# Altium PCB Mother_Board_New - 4 Layers - Fixed.PcbDoc (part 1 of 2)
Units mil, origin at the board's own origin, x right, y up, seen from the top; angles counter-clockwise.
Board outline 4940 x 2025 mil, 3 copper layers (Layer 1, Layer 2, Layer 3), stack 76.411 mil thick; 104 components, 89 nets, 362 pads, 31 vias.
Unrouted connection lines stored in the file: 65.
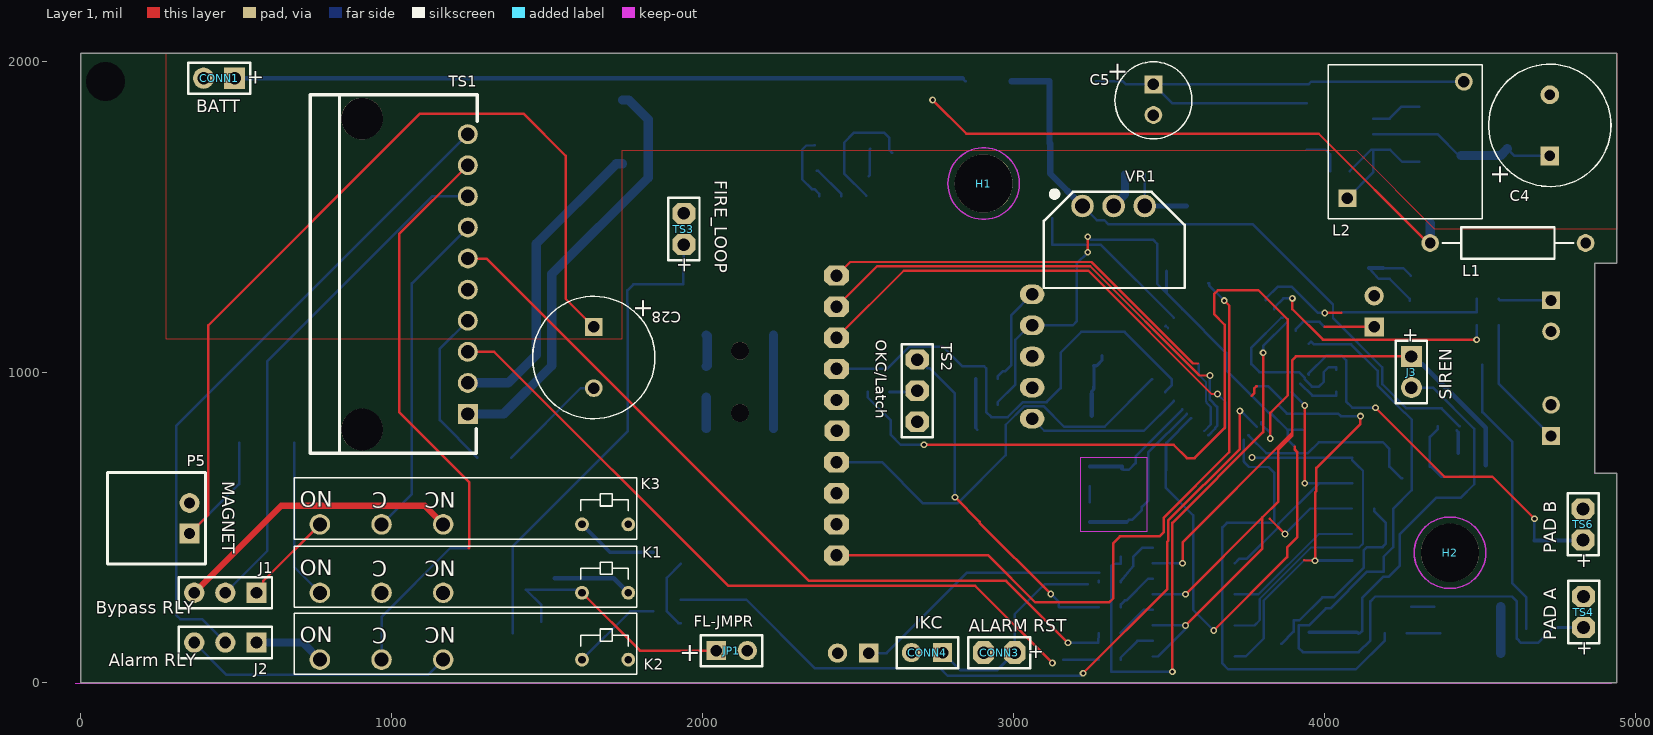
[diagram p0: Layer 1 view]
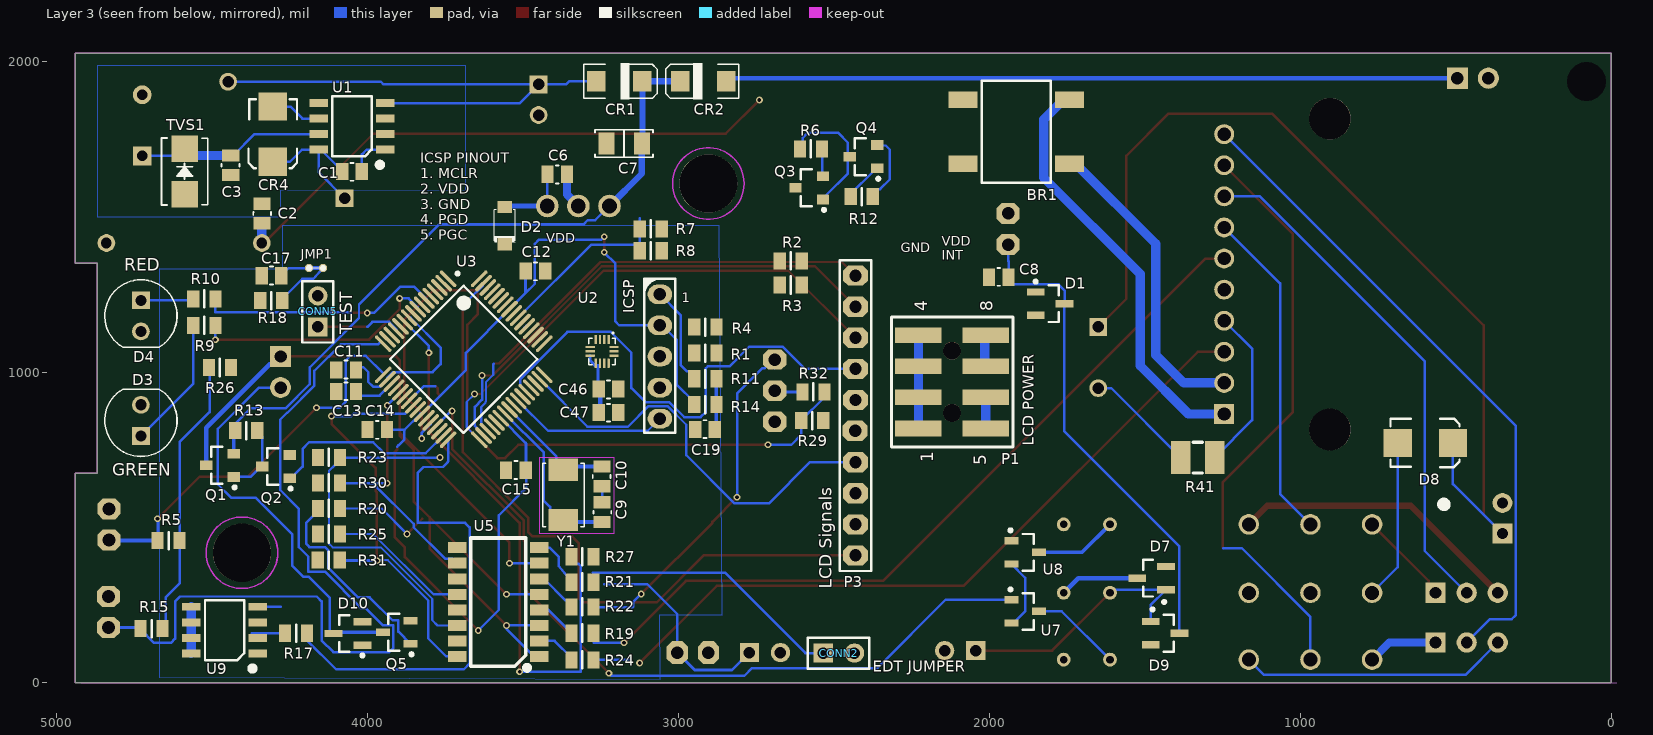
[diagram p1: Layer 3 view, seen from below]
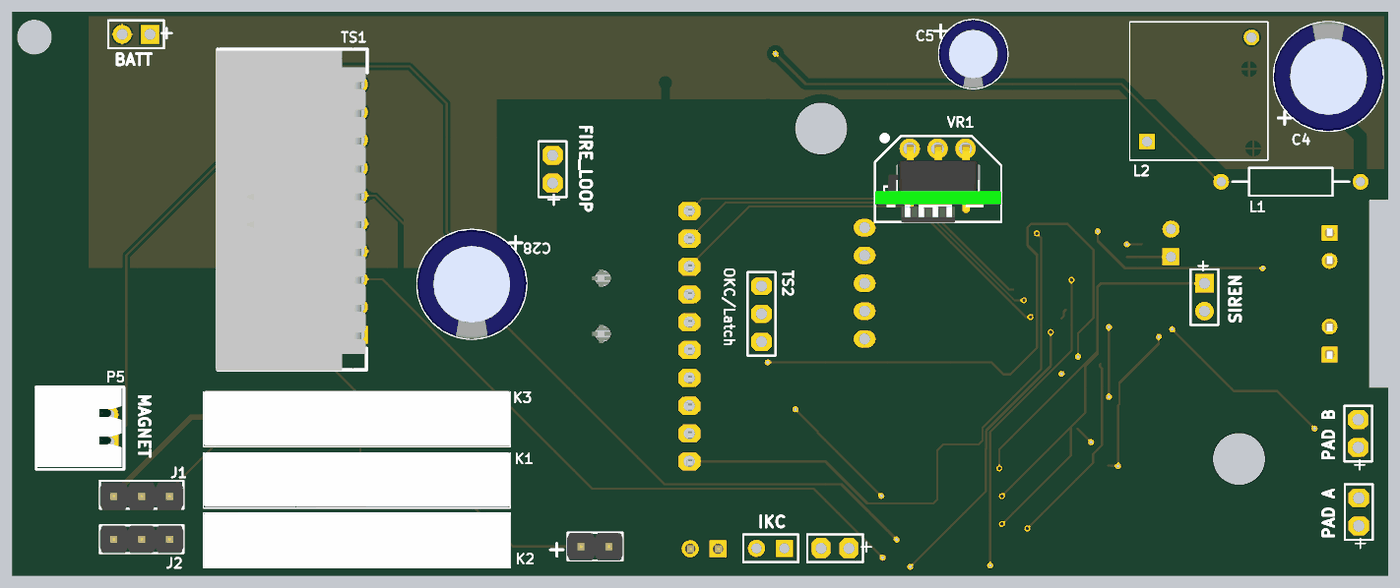
[diagram p3: 3D render of the assembled board from above, using the file's embedded part models]
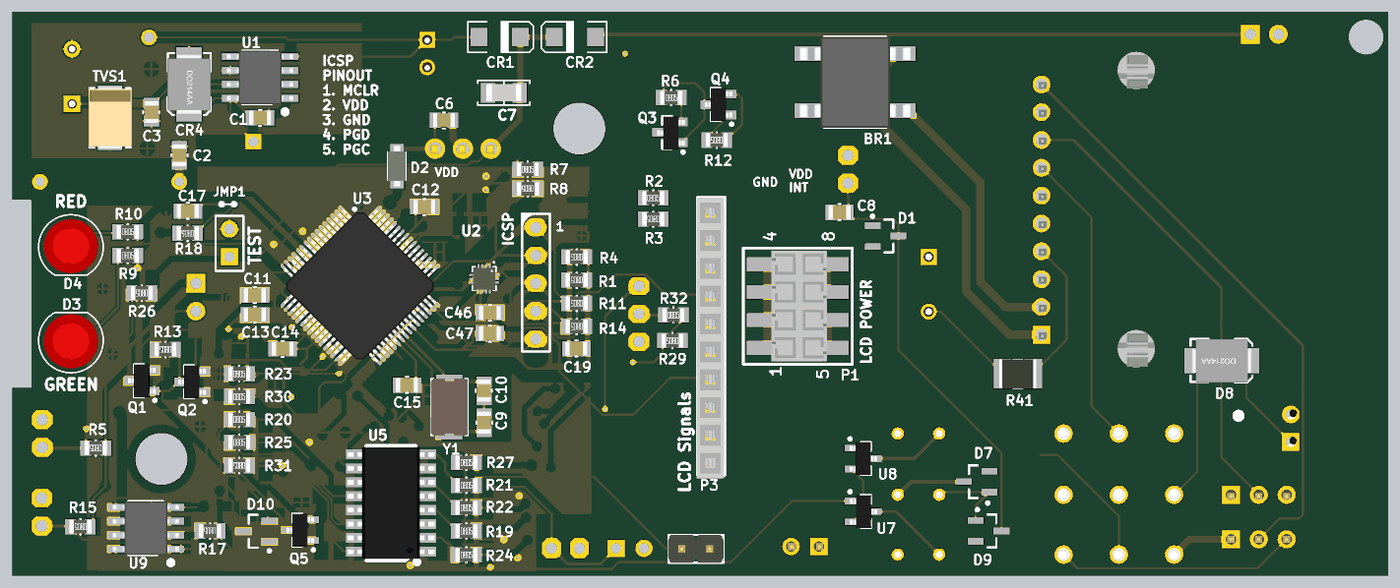
[diagram p4: 3D render of the assembled board from below, using the file's embedded part models]

## Layer stack, top to bottom
Dielectric 3: prepreg 2.8, PP-006, Dk 4.1
Layer 1: signal copper 3.937
Dielectric 2: prepreg 2.8, PP-006, Dk 4.1
Layer 2: signal copper 3.937
Dielectric 1: core 59, Core-043, Dk 4.3
Layer 3: signal copper 3.937

## Board outline
0,2025 0,0 4940,0 4940,675 4870,675 4870,1350 4940,1350 4940,2025

## Design rules (kind name [scope] priority, off if disabled: settings)
BoardOutlineClearance [All] p1: gap=15 ignorepadtopadclearanceinfootprint=FALSE
Clearance "Clearance Polygons" [InPolygon] p1: gap=10 ignorepadtopadclearanceinfootprint=FALSE except(0: Arc-Hole Track-Hole SMDPad-Hole THPad-Hole Via-Hole Fill-Hole Poly-Hole Region-Hole Text-Hole)
Clearance [All] p2: gap=5 ignorepadtopadclearanceinfootprint=FALSE except(0: Arc-Hole Track-Hole SMDPad-Hole THPad-Hole Via-Hole Fill-Hole Poly-Hole Region-Hole Text-Hole)
ComponentClearance "HM-TRP & UFL" [InComponent('X1') vs InComponent('U1')] p1 off: gap=0 collisioncheckmode=3 verticalgap=0 showdistances=FALSE
ComponentClearance [All] p2 off: gap=1 collisioncheckmode=3 verticalgap=1 showdistances=FALSE
DiffPairsRouting [All] p1: maxlimit=393.7 minlimit=5 mostfreqgap=8 toplayer_minwidth=5 toplayer_maxwidth=15 toplayer_prefwidth=8 midlayer1_minwidth=5 midlayer1_maxwidth=15 midlayer1_prefwidth=8 bottomlayer_minwidth=5 bottomlayer_maxwidth=15 bottomlayer_prefwidth=8 maxuncoupledlength=500
HoleSize [All] p1: absolutevalues=TRUE maxlimit=265 minlimit=10 maxpercent=80.000 minpercent=20.000
HoleToHoleClearance [All] p1: gap=10 allowstackedmicrovias=FALSE
MinimumAnnularRing [All] p1: minimumring=4
MinimumSolderMaskSliver [All] p1: minsoldermaskwidth=0
PlaneClearance [All] p1: clearance=10
PlaneConnect [All] p1: planeconnectstyle=Relief reliefexpansion=4 reliefentries=4 reliefconductorwidth=6 reliefairgap=6
PolygonConnect "Via connect style" [isVia] p1: thpad.connectstyle=Relief thpad.reliefconductorwidth=8 thpad.reliefentries=4 thpad.polygonreliefangle="90 Angle" thpad.airgapwidth=8 smdpad.connectstyle=Direct smdpad.reliefconductorwidth=10 smdpad.reliefentries=4 smdpad.polygonreliefangle="90 Angle" smdpad.airgapwidth=10 via.connectstyle=Direct via.reliefconductorwidth=10 via.reliefentries=4 via.polygonreliefangle="90 Angle" via.airgapwidth=10
PolygonConnect [All] p2: connectstyle=Relief reliefconductorwidth=10 reliefentries=4 polygonreliefangle="90 Angle" airgapwidth=6
RoutingCorners [All] p1: cornerstyle=45-Degree minsetback=49.21 maxsetback=49.21
RoutingVias [All] p1: holewidth=12 width=22 viastyle="Through Hole" minholewidth=10 minwidth=18 maxholewidth=100 maxwidth=114
SMDEntry [All] p1: side=TRUE corner=TRUE anyangle=FALSE
SMDNeckDown [All] p1: percent=50.000
SMDToCorner [All] p1: distance=20000
SMDToPlane [All] p1: distance=40000
SilkToSilkClearance [All] p1: silktosilkclearance=0
SilkToSolderMaskClearance [IsPad] p1: minsilkscreentomaskgap=5 clearancetoexposedcopper=TRUE
SolderMaskExpansion [All] p1: expansion=2.5 istentingtop=FALSE
Width GND [InNet('GND')] p1: maxlimit=30 minlimit=10 preferedwidth=20
Width Power [InNetClass('Power')] p2: maxlimit=40 minlimit=20 preferedwidth=30
Width 3V3 [InNetClass('3V3')] p3: maxlimit=30 minlimit=10 preferedwidth=20
Width [All] p4: maxlimit=400 minlimit=6 preferedwidth=8
20 further rules are at their usual default settings.

## Classes and differential pairs
component class U_Power: BR1 C1 C2 C3 C4 C5 C6 C7 CONN1 CR1 CR2 CR4 L1 L2 R2 R3 TVS1 U1 VR1
component class Relay_Outputs: J1 J2 K2 K3 U7 U8
component class U_MotherBoard: H1 H2
component class U_microcontroller: C8 C9 C10 C11 C12 C13 C15 C17 C19 C28 C46 C47 CONN2 CONN3 CONN4 CONN5 D1 D2 D3 D4 D7 D8 D9 D10 J3 JMP1 JP1 K1 P1 P3 P5 Q1 Q2 Q3 Q4 Q5 R1 R4 R5 R6 R7 R8 R9 R10 R11 R12 R13 R14 R15 R17 R18 R19 R20 R21 R22 R23 R24 R25 R26 R27 R29 R30 R31 R32 R41 TS1 TS2 TS3 TS4 TS6 U2 U3 U5 U9 Y1

## Components (designator, comment, footprint, x,y, rotation, side; value= is the part's Value field where it differs from the comment)
BR1 "DF02S" SOP520P1005X363-4N 1913.74,1772.64 r0 bottom
C1 "Cap" C0805 4050,1645 r180 bottom value=10pF
C2 "Cap" C0805 4340,1510 r90 bottom value=10nF
C3 "Cap" C0805 4440,1665 r270 bottom value=10nF
C4 "Cap Pol3" "10x12.5 CAP"#1 4725,1793.43 r90 top value=220uF
C5 "Cap Pol3" "6.3x15 Cap" 3450,1875.79 r270 top value=82uF
C6 "Cap Pol3" C0805 3389.93,1636.24 r180 bottom value=22uF
C7 "Cap 1206" "CAP 1206_3216 - 1.2MM" 3175,1735 r0 bottom value=10uF
C8 "Cap" C0805 1970,1305 r0 bottom value=0.1uF
C9 "Cap" C0805 3246,549.29 r90 bottom value=27pF
C10 "Cap" C0805 3246,664.29 r270 bottom value=27pF
C11 "Cap" C0805 4069,1007 r0 bottom value=10uF
C12 "Cap" C0805 3460,1325 r180 bottom value=100nF
C13 "Cap" C0805 4069,937 r0 bottom value=100nF
C14 "Cap" C0805 3969,815 r180 bottom value=100nF
C15 "Cap" C0805 3523,684 r0 bottom value=100nF
C17 "Cap" C0805 4309.29,1309.57 r0 bottom value=0.1uF
C19 "Cap" C0805 2915,815 r0 bottom value=0.1uF
C28 "Cap Pol3" "10x12.5 CAP"#2 1650,1046.57 r270 top value=220uF
C46 "Cap" C0805 3225,945 r180 bottom value=10uF
C47 "Cap" C0805 3225,870 r180 bottom value=0.1uF
CONN1 "BATT" BAT-2#1 445,1945 r180 top
CONN2 "EDT JUMPER" "2 PIN HEADER" 2434,96 r0 bottom
CONN3 "ALARM RST" BAT-2#2 2954,97.57 r180 top
CONN4 "IKC" "2 PIN HEADER" 2672,97.57 r0 top
CONN5 "TEST" "2 PIN HEADER" 4160,1245 r270 bottom
CR1 "Diode" "DIODE SMA" 3190,1935 r180 bottom
CR2 "Diode" "DIODE SMA" 2920,1935 r0 bottom
CR4 "D Schottky" SMB 4305,1765 r270 bottom locked
D1 "Diode" SOT-23_M 1805,1220 r180 bottom
D2 "D Schottky" SOD-123FL 3559,1471 r0 bottom
D3 "GREEN" "T-1 3/4" 4729.02,844.49 r90 bottom locked
D4 "RED" "T-1 3/4" 4729.02,1180.51 r270 bottom locked
D7 "Diode" SOT-23_M 1478,337 r0 bottom
D8 "Diode" SMB 598,772 r180 bottom
D9 "Diode" SOT-23_M 1435,160 r180 bottom
D10 "Diode" SOT-23_M 4063,159 r0 bottom
H1 "Siren Mounting Hole" "Siren Mount Hole"#1 1895,-155 r180 top locked
H2 "Siren Mounting Hole" "Siren Mount Hole"#2 1645,-155 r180 top locked
ICSP "" "SCHMARTBOARD - 920-0088-01" 2110,1629.92 r180 bottom
J1 "Bypass RLY" "3 PIN HEADER FOR RELAY" 465,290 r0 top
J2 "Alarm RLY" "3 PIN HEADER FOR RELAY" 465,130 r0 top
J3 "SIREN" BAT-2#3 4280,1000 r270 top
JMP1 "DogBone" DogBone 4158.24,1334.26 r0 bottom
JP1 "FL-JMPR" "2 PIN HEADER" 2144,104 r180 top
K1 "24V Relay" FTR-LY 1265,290 r180 top locked
K2 "24V Relay" FTR-LY 1265,75 r180 top locked
K3 "24V Relay" FTR-LY 1265,510 r180 top locked
L1 "Inductor" AXIAL-0.5 4590,1415 r0 top value=100uH
L2 "Inductor" PE-53819NL 4261.4,1746.4 r180 top locked value=173uH
P1 "LCD POWER" "MOLEX 15453508" 2120.3,968.36 r90 bottom locked
P3 "LCD Signals" "10 PIN HEADER" 2430.75,860 r180 bottom locked
P5 "MAGNET" 7025 350,529.57 r90 top locked
Q1 "FDN340P" SOT-23_N#1 4474.83,700 r0 bottom
Q2 "2N7002" SOT-23_N#1 4294.83,696 r0 bottom
Q3 "FDN340P" SOT-23_N#1 2579.14,1592.56 r0 bottom
Q4 "2N7002" SOT-23_N#1 2404.85,1692.56 r0 bottom
Q5 "2N3904" SOT-23_N#2 3906,163 r0 bottom value=MMBT2222
R1 "Res3" 6-0805_N 2913.59,1061.33 r0 bottom value=1K
R2 "1%" 6-0805_N 2638.83,1357.44 r180 bottom value=220K
R3 "1%" 6-0805_N 2638.83,1280.44 r0 bottom value=130K
R4 "Res3" 6-0805_N 2913.59,1144.49 r0 bottom value=10K
R5 "Res3" 6-0805_N 4640,458 r0 bottom value=10k
R6 "Resistor 10k +/-1% 0805" 6-0805_N 2574.14,1717.56 r180 bottom value=10k
R7 "1%" 6-0805_N 3089,1460 r180 bottom value=2M
R8 "1%" 6-0805_N 3089,1390 r0 bottom value=320K
R9 "Res3" 6-0805_N 4525,1150 r180 bottom value=178R
R10 "Res3" 6-0805_N 4525,1235 r180 bottom value=604R
R11 "Resistor 1k +/-1% 0603 100 mW" 6-0805_N 2913.59,978.16 r0 bottom value=470
R12 "Res3" 6-0805_N 2410.81,1564.78 r0 bottom value=10K
R13 "Resistor 10k +/-1% 0805" 6-0805_N 4390,812 r0 bottom value=10k
R14 "Resistor 10k +/-1% 0805" 6-0805_N 2913.59,895 r0 bottom value=10k
R15 "Res3" 6-0805_N 4695,175 r0 bottom value=10k
R17 "Res3" 6-0805_N 4230,160 r0 bottom value=3.3k
R18 "Res3" 6-0805_N 4310,1230 r0 bottom value=10k
R19 "Res3" 6-0805_N 3309,160 r180 bottom value=1.8K
R20 "Resistor 2.2k +/-5% 0805" 6-0805_N 4124.25,560.75 r180 bottom value=2.2k
R21 "Res3" 6-0805_N 3309,324 r180 bottom value=1.8K
R22 "Res3" 6-0805_N 3309,244 r180 bottom value=1.8K
R23 "Res3" 6-0805_N 4124.25,725 r180 bottom value=10K
R24 "Res3" 6-0805_N 3309,74 r180 bottom value=1.8K
R25 "Res3" 6-0805_N 4124.25,478.62 r180 bottom value=10K
R26 "Res3" 6-0805_N 4475,1015 r0 bottom value=10k
R27 "Res3" 6-0805_N 3309,406 r180 bottom value=10k
R29 "Res3" 6-0805_N 2570,844 r0 bottom value=10K
R30 "Res3" 6-0805_N 4124.25,642.87 r180 bottom value=10K
R31 "Res3" 6-0805_N 4125,395 r0 bottom value=10K
R32 "Res3" 6-0805_N 2566,936 r180 bottom value=1K
R41 "10R" RESC_1210 1330,720 r180 bottom
TS1 "Molex SL Header" "10 Pin Molex Horizontal - duplicate" 1245,1315 r90 top locked
TS2 "OKC/Latch" "3 Pin Footprint" 2690,940 r270 top
TS3 "FIRE_LOOP" BAT-2#2 1940,1460 r90 top
TS4 "PAD A" BAT-2#4 4834,228 r90 top
TS6 "PAD B" BAT-2#4 4832,510 r90 top
TVS1 "SMBJ43CA" SMBJSeries_LTF 4588.45,1645.18 r270 bottom
U1 "LM2674" SOIC127P600X175-8N 4050,1790 r0 bottom locked
U2 "LIS2DHTR" PQFN35P200X200X100-14N 3245.67,1066.61 r270 bottom
U3 "PIC18F67J10T-I/PT" PIC18F67J10T-I/PT 3691.06,1040.95 r225 bottom locked
U5 "TCMT4106" SSOP-16 3580,260 r0 bottom
U7 "SZNUD3160LT1G" SOT-23_N#2 1885,230 r180 bottom
U8 "SZNUD3160LT1G" SOT-23_N#2 1885,420 r180 bottom
U9 "AUIPS7091GTR" SOIC127P600X175-8N 4460,170 r0 bottom
VR1 "" VXO78-1000 3322,1534 r0 top locked
Y1 "8MHz" ABM3 3371,605 r90 bottom

## Footprints (in the part's own frame and the unit in brackets; to place one, negate y for a bottom-side part, rotate by r counter-clockwise, add the part's x,y. Pads: shape width x height; smd on the part's side, far side on the other; paste and mask are expansions set on the pad)
"2 PIN HEADER" [mil]
  rect 62x62 hole 37: 1(100,0)
  round 62 hole 37: 2(0,0)
  silkscreen extent -47,-50 150,50, body extent -48,-49 152,51, height 341
"3 Pin Footprint" [mil]
  oct 65x75 hole 40: 1(100,0) 2(0,0) 3(-100,0)
  silkscreen extent -150,-50 150,50
"3 PIN HEADER FOR RELAY" [mil]
  rect 65x65 hole 38: 1(100,0)
  round 65 hole 38: 2(0,0) 3(-100,0)
  silkscreen extent -150,-50 150,50, body extent -150,-56 150,44, height 343
6-0805_N [mm] "Chip Resistor, Body 2.0x1.2mm, IPC Medium Density"
  rect 1x1.4 smd: 1(-0.9,0) 2(0.9,0)
  silkscreen extent 0,-0.69 0,0.71, body extent -1.01,-0.63 0.99,0.62, height 0.2
"6.3x15 Cap" [mil] "6.3x15 Cap"
  rect 57x57 hole 37: 1(-49.21,0)
  round 57 hole 37: 2(49.21,0)
  silkscreen extent -122,-124 126,124, body extent -122,-124 126,124, height 520
"10 PIN HEADER" [mil] "10 pin header, vertical"
  oct 80x65 hole 40: 1(0,-450) 2(0,-350) 3(0,-250) 4(0,-150) 5(-1,-49) 6(0,50) 7(0,150) 8(0,250) 9(0,350) 10(0,450)
  silkscreen extent -50,-500 50,500, body extent -52,-511 46,498, height 346
"10 Pin Molex Horizontal - duplicate" [mil] "Horizontal Molex SL 10 Pin Connector"
  round 133.86 hole 133.86 unplated mask+0: 0(-500,340.16) 0(500,340.16)
  rect 64x64 hole 42.91: 1(-450,0)
  round 64 hole 42.91: 2(-350,0) 3(-250,0) 4(-150,0) 5(-50,0) 6(50,0) 7(150,0) 8(250,0) 9(350,0) 10(450,0)
  silkscreen extent -576,-30 578,507, body extent -579,-24 571,511, height 278
"10x12.5 CAP"#1 [mil] "10x12.5 CAP"
  rect 60x60 hole 34: 1(-98.43,0)
  round 60 hole 34: 2(98.42,0)
  silkscreen extent -197,-197 197,197, body extent -197,-197 197,197, height 500
"10x12.5 CAP"#2 [mil] "10x12.5 CAP"
  rect 57x57 hole 37: 1(-98.43,0)
  round 57 hole 37: 2(98.42,0)
  silkscreen extent -197,-197 197,197, body extent -197,-197 197,197, height 500
7025 [mil] "MOLEX SPOX 2-terminal right angle through hole header"
  rect 64x64 hole 35.43: 1(-49.21,0)
  round 64 hole 35.43: 2(49.21,0)
  silkscreen extent -148,-51 148,264, body extent -140,-42 151,269, height 195
ABM3 [mm] "8MHz Crystal SMD"
  rect 1.8x2.4 smd: 1(-2.05,0) 2(2.05,0)
  silkscreen extent -2.59,-1.73 2.59,1.68, body extent -2.6,-1.7 2.6,1.7, height 1.3
AXIAL-0.5 [mil] "Axial Device, Thru-Hole; 2 Leads; 0.5 in Pin Spacing"
  round 57 hole 34: 1(-250,0) 2(250,0)
  silkscreen extent -210,-50 210,50
BAT-2#1 [mil] "Battery; 2 Leads"
  rect 68x68 hole 40: 1(-50,0)
  round 68 hole 40: 2(50,0)
  silkscreen extent -100,-50 100,50
BAT-2#2 [mil] "Battery; 2 Leads"
  oct 68x74 hole 40: 1(-50,0) 2(50,0)
  silkscreen extent -100,-50 100,50
BAT-2#3 [mil] "Battery; 2 Leads"
  rect 67x67 hole 40: 1(-50,0)
  round 67 hole 40: 2(50,0)
  silkscreen extent -100,-50 100,50
BAT-2#4 [mil] "Battery; 2 Leads"
  oct 68x74 hole 42: 1(-50,0) 2(50,0)
  silkscreen extent -100,-50 100,50
C0805 [mm]
  rect 1x1.4 smd: 1(-0.8,0) 2(0.8,0)
  silkscreen extent -0.12,-0.75 0.12,0.7, body extent -1,-0.64 1,0.64, height 1.27
"CAP 1206_3216 - 1.2MM" [mm] "Chip Capacitor, 2-Leads, Body 3.25x1.60mm, IPC Medium Density"
  rect 1.3x1.8 smd: 1(-1.45,0) 2(1.45,0)
  silkscreen extent -2.38,-1.13 2.38,1.13, body extent -1.6,-0.8 1.6,0.8, height 1.2
"DIODE SMA" [mm] "DIODE SMA Package"
  rect 1.52x1.68 smd: 1(-1.88,0) 2(1.88,0)
  silkscreen extent -2.9,-1.46 3.07,1.46, body extent -2.28,-1.45 2.32,1.45, height 2.4
DogBone [mil]
  oct 25x25 smd mask+4: 1(-15,0) 2(30,0)
FTR-LY [mil] "SPDT RELAY 6A SLIM TYPE"
  round 66 hole 45: 1(297.64,0) 2(99.21,0) 3(496.06,0)
  round 44.37 hole 24.68: 4(-496.06,0) 5(-347.24,0)
  silkscreen extent -524,-150 579,47, body extent -525,-153 577,43, height 571
"MOLEX 15453508" [mil] "2.54mm Pitch C-Grid PCB Connector, Surface Mount, High Profile, Dual Row, Vertical, 8 Circuits"
  round 57 hole 57 unplated: 0(-100,0) 0(100,0)
  rect 50x150 smd: 1(-150,108) 2(-50,108) 3(50,108) 4(150,108) 5(-150,-108) 6(-50,-108) 7(50,-108) 8(150,-108)
  silkscreen extent -209,-196 208,195, body extent -200,-139 199,127, height 40
PE-53819NL [mil] "INDUCTOR for 12V Regulator"
  rect 57x57 hole 37: 1(187.4,187.4)
  round 57 hole 37: 2(-187.4,-187.4)
  silkscreen extent -246,-243 250,254, body extent -246,-242 250,254, height 375
PIC18F67J10T-I/PT [mm]
  oval 1.8x0.3 smd: 1(-5.55,3.75) 2(-5.55,3.25) 3(-5.55,2.75) 4(-5.55,2.25) 5(-5.55,1.75) 6(-5.55,1.25) 7(-5.55,0.75) 8(-5.55,0.25) 9(-5.55,-0.25) 10(-5.55,-0.75) 11(-5.55,-1.25) 12(-5.55,-1.75) 13(-5.55,-2.25) 14(-5.55,-2.75) 15(-5.55,-3.25) 16(-5.55,-3.75) 33(5.55,-3.75) 34(5.55,-3.25) 35(5.55,-2.75) 36(5.55,-2.25) 37(5.55,-1.75) 38(5.55,-1.25) 39(5.55,-0.75) 40(5.55,-0.25) 41(5.55,0.25) 42(5.55,0.75) 43(5.55,1.25) 44(5.55,1.75) 45(5.55,2.25) 46(5.55,2.75) 47(5.55,3.25) 48(5.55,3.75)
  oval 0.3x1.8 smd: 17(-3.75,-5.55) 18(-3.25,-5.55) 19(-2.75,-5.55) 20(-2.25,-5.55) 21(-1.75,-5.55) 22(-1.25,-5.55) 23(-0.75,-5.55) 24(-0.25,-5.55) 25(0.25,-5.55) 26(0.75,-5.55) 27(1.25,-5.55) 28(1.75,-5.55) 29(2.25,-5.55) 30(2.75,-5.55) 31(3.25,-5.55) 32(3.75,-5.55) 49(3.75,5.55) 50(3.25,5.55) 51(2.75,5.55) 52(2.25,5.55) 53(1.75,5.55) 54(1.25,5.55) 55(0.75,5.55) 56(0.25,5.55) 57(-0.25,5.55) 58(-0.75,5.55) 59(-1.25,5.55) 60(-1.75,5.55) 61(-2.25,5.55) 62(-2.75,5.55) 63(-3.25,5.55) 64(-3.75,5.55)
  silkscreen extent -5.42,-4.25 4.25,4.72, body extent -6,-6 6,6, height 1.2
PQFN35P200X200X100-14N [mm]
  rrect25% 0.75x0.2 smd: 1(-0.975,0.525) 2(-0.975,0.175) 3(-0.975,-0.175) 4(-0.975,-0.525) 8(0.975,-0.525) 9(0.975,-0.175) 10(0.975,0.175) 11(0.975,0.525)
  rrect25% 0.2x0.75 smd: 5(-0.35,-0.975) 6(0,-0.975) 7(0.35,-0.975) 12(0.35,0.975) 13(0,0.975) 14(-0.35,0.975)
  silkscreen extent -1.55,-1.08 1.08,1.08, body extent -1,-1 1,1, height 1
RESC_1210 [mm]
  rect 1.6x2.7 smd: 1(-1.4,0.127) 2(1.4,0.127)
  silkscreen extent -0.4,-1.12 0.4,1.38, body extent -1.68,-1.19 1.67,1.45, height 0.71
"SCHMARTBOARD - 920-0088-01" [mm] "Arduino pin header set"
  oval 2x1.6 hole 1.02: 1(-24.13,-9.65) 2(-24.13,-12.19) 3(-24.13,-14.73) 4(-24.13,-17.27) 5(-24.13,-19.81)
  silkscreen extent -25.4,-20.95 -22.86,-8.38
"Siren Mount Hole"#1 [mil]
  round 187 hole 187 unplated: 0(-1009,-1761.3)
"Siren Mount Hole"#2 [mil]
  round 187 hole 187 unplated: 0(-2759,-573.7)
SMB [mm] "DO-214-AA/SMB; 2 C-Bend Leads; Body 5.3 x 3.6 mm, inc. leads (LxW)"
  rect 2.3x2.3 smd: 1(-2.25,0) 2(2.25,0)
  silkscreen extent -2.84,-1.98 2.79,1.98, body extent -2.79,-1.97 2.79,1.97, height 2.28
SMBJSeries_LTF [mil]
  rect 86x86 smd paste+0 mask+0: 1(-73,0) 2(73,0)
  silkscreen extent -107,-75 108,74, body extent -110,-77 110,77, height 98
SOD-123FL [mm]
  rect 1.2x1 smd mask+0: 1(0,1.525) 2(0,-1.525)
  silkscreen extent -0.85,-1.3 0.85,1.35, body extent -0.8,-1.85 0.8,1.85, height 1.15
SOIC127P600X175-8N [mm]
  rect 1.525x0.65 smd: 1(-2.712,1.905) 2(-2.712,0.635) 3(-2.712,-0.635) 4(-2.712,-1.905) 5(2.712,-1.905) 6(2.712,-0.635) 7(2.712,0.635) 8(2.712,1.905)
  silkscreen extent -2.48,-2.45 1.6,3.35, body extent -3,-2.45 3,2.45, height 1.75
SOP520P1005X363-4N [mm]
  rect 2.35x1.35 smd: 1(-4.35,2.6) 2(-4.35,-2.6) 3(4.35,-2.6) 4(4.35,2.6)
  silkscreen extent -2.82,-4.16 2.82,4.16, body extent -5.03,-4.16 5.02,4.16, height 3.63
SOT-23_M [mm] "SOT23, 3-Leads, Body 2.9x1.3mm, Pitch 0.95mm, Lead Span 2.5mm, IPC Low Density"
  rect 1.45x0.6 smd: 1(-1.175,0.95) 2(-1.175,-0.95) 3(1.175,0)
  silkscreen extent -1.3,-1.5 0.7,1.92, body extent -0.7,-1.5 0.7,1.5, height 1.1
SOT-23_N#1 [mm] "SOT23, 3-Leads, Body 2.9x1.3mm, Pitch 0.95mm, Lead Span 2.5mm, IPC Medium Density"
  rect 1x0.8 smd: 1(-1.125,0.95) 2(-1.125,-0.95) 3(1.125,0)
  silkscreen extent -1.32,-1.5 0.7,1.92, body extent -1.25,-1.5 1.25,1.5, height 1.1
SOT-23_N#2 [mm] "SOT23, 3-Leads, Body 2.9x1.3mm, Pitch 0.95mm, Lead Span 2.5mm, IPC Medium Density"
  rect 1.15x0.6 smd: 1(-1.125,0.95) 2(-1.125,-0.95) 3(1.125,0)
  silkscreen extent -1.32,-1.5 0.7,1.92, body extent -1.25,-1.5 1.25,1.5, height 1.1
SSOP-16 [mm]
  rect 1.5x0.9 smd mask+0: 1(-3.35,4.445) 2(-3.35,3.175) 3(-3.35,1.905) 4(-3.35,0.635) 5(-3.35,-0.635) 6(-3.35,-1.905) 7(-3.35,-3.175) 8(-3.35,-4.445) 9(3.35,-4.445) 10(3.35,-3.175) 11(3.35,-1.905) 12(3.35,-0.635) 13(3.35,0.635) 14(3.35,1.905) 15(3.35,3.175) 16(3.35,4.445)
  silkscreen extent -2.51,-5.24 2.25,5.52, body extent -3.96,-5.1 3.96,5.1, height 2.05
"T-1 3/4" [mil] "T-1 3/4 LED"
  rect 57x57 hole 36: 1(-50,0)
  round 57 hole 36: 2(50,0)
  silkscreen extent -116,-116 101,116, body extent -101,-98 96,98, height 315
VXO78-1000 [mm] "NON-ISOLATED DC SWITCHING REGULATOR"
  round 1.85 hole 1.2 mask+0: 1(-2.54,0) 2(0,0) 3(2.54,0)
  silkscreen extent -5.7,-6.7 5.8,1.2, body extent -5.69,-6.77 5.81,0.31, height 17.5

## Part data
BR1: "Bridge Rectifier", MFR=Vishay, ComponentLink1Description=Datasheet, ComponentLink1URL=http://www.vishay.com/docs/88573/dfs.pdf, Height=3.63mm, MFR P/N=DF02S, Mounting Technology=SMT
C1 C12 C13 C14 C15: "Capacitor", Case/Package=0805, Mounting Technology=SMT, PACKAGE=0805, PackageReference=0805
  C12 C13 C14 C15: ComponentLink1Description=Datasheet, Detex P/N=101727-1
C2 C3: library part CMP-001-00016-4, "Capacitor Ceramic X7R 50V 10nF 0805", Case/Package=1206, Tolerance=10%, Voltage Rating=50V, Detex P/N=101727-12, Mounting Technology=SMT, PACKAGE=1206, Pins=2
C4: "Polarized Capacitor (Surface Mount)", PACKAGE="10x12.5 50V radial capacitor", Voltage=50V, ComponentLink1Description=Datasheet, ComponentLink1URL=http://products.nichicon.co.jp/en/pdf/XJA043/e-uvz.pdf, Detex P/N=103517-221, Mounting Technology=Thru-Hole
C5: "Polarized Capacitor (Surface Mount)", MFR=Panasonic, MFR P/N=EEUFC1V820, PACKAGE="6.3x15 35V radial capacitor", Voltage=35V, ComponentLink1Description=Datasheet, ComponentLink1URL=http://www.farnell.com/datasheets/1901197.pdf, Detex P/N=102102-2, Mounting Technology=Thru-Hole
C6: "Multilayer Ceramic Capacitors MLCC - SMD/SMT 22UF 10V 20% 0805", Case/Package=0805, MFR="Murata Electronics", MFR P/N=GRM21BR61A226ME51L, Voltage=10V, ComponentLink1Description=Datasheet, ComponentLink1URL=http://www.farnell.com/datasheets/1901197.pdf, Mounting Technology=SMT, PACKAGE=0805, PackageReference=0805
C7: library part "Cap Pol3", "Multilayer Ceramic Capacitors MLCC - SMD/SMT 1206 50V 10uF 10% AEC-Q200", Case/Package=1206, MFR=TDK, MFR P/N=CGA5L1X7R1H106K160AC, Voltage=50V, ComponentLink1Description=Datasheet, ComponentLink1URL=https://product.tdk.com/info/en/catalog/datasheets/mlcc_automotive_general_en.pdf?ref_disty=mouser, Mounting Technology=SMT, PACKAGE=1206, PackageReference=1206
C8 C17 C19 C47: "Capacitor Ceramic X7R 50V 0.1uF 0805 SMT", Case/Package=0805, MFR=KEMET, MFR P/N=C0805C104K4RACTU, ComponentLink1Description=Datasheet, Detex P/N=101727‐7, Mounting Technology=SMT, PACKAGE=0805, PackageReference=0805
C9: library part CMP-001-00055-2, "Multilayer Ceramic Capacitors MLCC - SMD/SMT 100V 27pF C0G 0805 5% AEC-Q200", Case/Package=0805, MFR=AVX, MFR P/N=08051A270J4T2A, Tolerance=20%, Voltage Rating=25V, Mounting Technology=SMT, PACKAGE=0805, PackageReference=0805, Pins=2
C10: library part CMP-001-00055-2, "Multilayer Ceramic Capacitors MLCC - SMD/SMT 100V 27pF C0G 0805 5% AEC-Q200", Case/Package=0805, MFR=AVX, MFR P/N=08051A270J4T2A, PACKAGE="0805 SMD 1/8W", Tolerance=20%, Voltage Rating=25V, Mounting Technology=SMT, Pins=2
C11 C46: "Multilayer Ceramic Capacitors MLCC - SMD/SMT CGA 0805 6.3V 10uF X7R 10% AEC-Q200", Case/Package=0805, MFR=TDK, MFR P/N=CGA4J1X7R0J106K125AC, Voltage="6.3 V", ComponentLink1Description=Datasheet, ComponentLink1URL=https://product.tdk.com/info/en/catalog/datasheets/mlcc_automotive_general_en.pdf?ref_disty=mouser, Mounting Technology=SMT, PACKAGE=0805, PackageReference=0805
C28: "Polarized Capacitor (Surface Mount)", Case/Package=Radial, MFR=Nichicon, MFR P/N=URZ2A221MHD, PACKAGE="10x12.5mm Electrolytic Capacitor", ComponentLink1Description=Datasheet, PackageReference=Radial
CONN1 CONN3 J3: library part "Header 2", "Header, 2-Pin"
  CONN1: ComponentLink1Description=Datasheet
  CONN3: Mounting Technology=Thru-Hole
  J3: ComponentLink1Description=Datasheet, Mounting Technology=Thru-Hole
CONN2 CONN4 CONN5 JP1: library part "Header 2", "2.54mm Pitch 2 Way 1 Row Straight Pin Header, Through Hole", MFR="TE Connectivity", MFR P/N=5-146285-2
  CONN2 CONN4 CONN5: Mounting Technology=Thru-Hole
CR1 CR2: "Default Diode", Case/Package=DO-214AB, MFR P/N=4004TR, ComponentLink1Description=Datasheet, Detex P/N=PP-5970-2, Mounting Technology=SMT, PACKAGE=DO-214AB
CR4: "Schottky Barrier Rectifier", Case/Package=SMB, MFR=VIshay, MFR P/N=SS26, ComponentLink1Description=Datasheet, ComponentLink1URL=http://www.vishay.com/docs/88748/ss22.pdf, Detex P/N=101672-2, Mounting Technology=SMT, PACKAGE=SMB
D1 D7 D9 D10: "DIODE SIGNAL SMT 75 VOLTS", Case/Package=SOT-23, MFR P/N=1N4148W, PACKAGE=SOT-23-3, ComponentLink1Description=Datasheet, Detex P/N=PP-5932-1, Mounting Technology=SMT
D2: "Schottky Barrier Rectifier", Case/Package=SOD-123, MFR="ROHM Semiconductor", MFR P/N=RB161MM-20TR, PACKAGE=SOD-123FL, ComponentLink1Description=Datasheet, ComponentLink1URL=https://www.mouser.com/datasheet/2/348/rb161mm-20tr-e-1870160.pdf, Mounting Technology=SMT
D3: library part LED2, "Typical RED, GREEN, YELLOW, AMBER GaAs LED", Case/Package="T-1 3/4", Forward Voltage=2.65V, MFR=Kingbright, MFR P/N=WP7113LZGCK, ComponentLink1Description=Datasheet, Detex P/N=102671-2, PACKAGE="T-1 3/4"
D4: library part LED2, "Typical RED, GREEN, YELLOW, AMBER GaAs LED", Case/Package="T-1 3/4", Forward Voltage=1.8V, MFR=Kingbright, MFR P/N=WP7113LSECK/J3, ComponentLink1Description=Datasheet, Detex P/N=102671-1, PACKAGE="T-1 3/4"
D8: "DIODE RECTIFIER 4004 SMT", Case/Package=SMB, MFR P/N=4004TR, ComponentLink1Description=Datasheet, Detex P/N=PP‐5970‐2, Mounting Technology=SMT, PACKAGE=SMB
J1 J2: library part "Header 3", "Header, 3-Pin", ComponentLink1Description=Datasheet
K1 K2 K3: library part Relay-SPDT, "SPST (1 Form A)", MFR=Fujitsu, MFR P/N=FTR-LYAA024Y, ComponentLink1Description=Datasheet, Detex P/N=106224, Mounting Technology=Thru-Hole
  K1 K2: ComponentLink1URL=http://www.rmorais.utad.pt/RMPDFFiles/PDFDatasheets/FTR-LY.pdf
L1: MFR=Fastron, MFR P/N=SMCC/N-101J-01, PACKAGE="Leaded Inductor", ComponentLink1Description=Datasheet, ComponentLink1URL=http://www.fastrongroup.com/image-show/72/SMCC.pdf?type=Complete-DataSheet&productType=series, Detex P/N=101673-2, Mounting Technology=Thru-Hole
L2: MFR=Pulse, MFR P/N=PE-53819, PACKAGE="Toroid Inductor THT", ComponentLink1Description=Datasheet, ComponentLink1URL=http://products.pulseelex.com/files/product_files/SPM2007_47.pdf, Detex P/N=102104-1, Mounting Technology=Thru-Hole
P1: library part "2x4 Header", MFR=Samtec, MFR P/N=SSM-104-F-DV, ComponentLink1Description=Datasheet, ComponentLink1URL=https://www.mouser.com/datasheet/2/527/ssm_sm-1317000.pdf, Mounting Technology=SMT
P3: library part "Header 10", "Headers & Wire Housings 10 PIN SIL VERTICAL SOCKET", MFR=Harwin, MFR P/N=M20-7821042, Mounting Technology=Thru-Hole
P5 TS6: library part "Header 2", "Header, 2-Pin", MFR=Molex, MFR P/N=22-05-7025, ComponentLink1Description=Datasheet, Detex P/N=103520-2, Mounting Technology=Thru-Hole
Q1 Q3: library part MOSFET-P, "P-Channel MOSFET", Case/Package=SOT-23-3, MFR="ON Semiconductor / Fairchild", MFR P/N=NDS0605, PACKAGE=SOT-23, ComponentLink1Description=Datasheet, ComponentLink1URL=https://www.mouser.com/datasheet/2/308/NDS0605-1125221.pdf, Mounting Technology=SMT
Q2 Q4: library part MOSFET-N, "N-Channel MOSFET", Case/Package=SOT-23-3, MFR="ON Semiconductor", PACKAGE=SOT-23, ComponentLink1Description=Datasheet, ComponentLink1URL=https://www.mouser.com/datasheet/2/308/NDS7002A-D-1522662.pdf, Detex P/N=101676, MFR P/N=2N7002, Mounting Technology=SMT
Q5: library part 2N3904_SMT, "NPN Darlington Bipolar Transistor", Case/Package=SOT-23-3, MFR P/N=MMBT3904, PACKAGE=SOT-23, Design Item ID=2N3904_SMT, Detex P/N=PP-5933-1, Mounting Technology=SMT, Pin Count=3
R1 R32: "Resistor 1K Ohm 1% 0805 SMT", Case/Package=0805, MFR=Vishay/Dale, MFR P/N=CRCW08051K00FKEA, PACKAGE="0805 SMD 1/8W", ComponentLink1Description=Datasheet, Detex P/N=101734-12, Mounting Technology=SMT, PackageReference=0805
R2: library part Res3, "Resistor 220K Ohm 1% 0805 SMT", Case/Package=0805, PACKAGE="0805 SMD 1/8W", ComponentLink1Description=Datasheet, Detex P/N=101734-23, Mounting Technology=SMT
R3: library part Res3, "Resistor 130K Ohm 1% 0805 SMT", Case/Package=0805, MFR=Vishay/Dale, MFR P/N=CRCW0805130KFKEA, PACKAGE="0805 SMD 1/8W", ComponentLink1Description=Datasheet, Detex P/N=101734-X, Mounting Technology=SMT
R4 R5 R12 R15 R18 R23 R25 R26 R27 R29 R30 R31: "Resistor", Case/Package=0805, PACKAGE="0805 SMD 1/8W", ComponentLink1Description=Datasheet, Mounting Technology=SMT
  R23 R25 R29 R30 R31: PackageReference=0805
R6 R13 R14: library part CMP-009-00017-4, "Chip Resistor, 10 KOhm, +/- 1%, 01 W, -55 to 155 degC, 0805", Case/Package=0805, PACKAGE="0805 SMD 1/8W", Power=100mW, Tolerance=1%, Voltage Rating=50V, Mounting Technology=SMT, Pins=2
R7: library part Res3, "Resistor 2M Ohm 1% 0805 SMT", Case/Package=0805, MFR=Vishay/Dale, MFR P/N=CRCW08052M00FKEA, PACKAGE="0805 SMD 1/8W", ComponentLink1Description=Datasheet, Detex P/N=101734-25, Mounting Technology=SMT
R8: library part Res3, "Thin Film Resistors - SMD 1/8W 316K ohm 1% 50ppm", Case/Package=0805, MFR=Yageo, MFR P/N=RT0805FRE07316KL, PACKAGE="0805 SMD 1/8W", ComponentLink1Description=Datasheet, ComponentLink1URL=https://www.mouser.com/datasheet/2/447/PYu-RT_1-to-0.01_RoHS_L_11-1669912.pdf, Mounting Technology=SMT
R9: "Resistor", Case/Package=0805, MFR="Vishay / Dale", MFR P/N=CRCW0805178RFKEA, PACKAGE="0805 SMD 1/8W", ComponentLink1Description=Datasheet, Mounting Technology=SMT
R10: "Thick Film Resistors - SMD 1/8Watt 604ohms 1%", Case/Package=0805, MFR="Vishay / Dale", MFR P/N=CRCW0805604RFKEAC, PACKAGE="0805 SMD 1/8W", ComponentLink1Description=Datasheet, Mounting Technology=SMT
R11: library part CMP-009-00014-4, "Chip Resistor, 1 KOhm, +/-1%, 0.1 W, -55 to 155 degC, 0603 (1608 Metric)", Case/Package=0805, MFR=Vishay/Dale, MFR P/N=CRCW0805470RFKEA, Power=100mW, Tolerance=1%, Voltage Rating=50V, Detex P/N=101734-10, Mounting Technology=SMT, PACKAGE=0805, Pins=2
R17: "Resistor 3.3KOhm 5% 0805 SMT", Case/Package=0805, MFR=Vishay/Dale, MFR P/N=CRCW08053K30JNEA, PACKAGE="0805 SMD 1/8W", ComponentLink1Description=Datasheet, Detex P/N=101734-4, Mounting Technology=SMT, PackageReference=0805
R19 R21 R22 R24: "Resistor", Case/Package=0805, MFR="Vishay / Dale", MFR P/N=CRCW08051K82FKEA, PACKAGE="0805 SMD 1/8W", ComponentLink1Description=Datasheet, Mounting Technology=SMT
  R19 R21 R22: Detex P/N=101734-4
  R24: Detex P/N=101734-13
R20: library part CMP-009-00017-4, "Chip Resistor, 2.2KOhm, +/- 5%, 01 W, -55 to 155 degC, 0805", Case/Package=0805, PACKAGE="0805 SMD 1/8W", Power=100mW, Tolerance=1%, Voltage Rating=50V, Mounting Technology=SMT, Pins=2
R41: library part RESC_1210, "Resistor 10 Ohm 5% 1210 SMD", Case/Package=1210, MFR=Vishay/Dale, MFR P/N=CRCW121010R0JNEA, Detex P/N=101734-28, Mounting Technology=SMT, PACKAGE=1210
TS1: library part SPOX-10P, MFR=Molex, MFR P/N=70555-0009, Mounting Technology=Thru-Hole
TS2: library part "Header 3H", "Header, 3-Pin, Right Angle", MFR=Molex, MFR P/N=22-05-7035, Mounting Technology=Thru-Hole
TS3 TS4: library part "Header 2H", "Header, 2-Pin, Right Angle"
  TS3: Mounting Technology=Thru-Hole
TVS1: "69.4V Clamp 8.7A Ipp Tvs Diode Surface Mount DO-214AA (SMBJ)", MFR="Littelfuse Inc", PACKAGE=DO214AA, ComponentLink1Description=Datasheet, ComponentLink1URL=https://www.littelfuse.com/~/media/electronics/datasheets/tvs_diodes/littelfuse_tvs_diode_smbj_datasheet.pdf.pdf, Detex P/N=103516-43, MFR P/N=SMBJ43CA, Mounting Technology=SMT, PackageReference=SMB
U1: library part LM2674M-12, "IC REG BUCK 12V 0.5A 8-SOIC", Case/Package=SOIC-8, Detex P/N=102101-1, MFR P/N=LM2674, Mounting Technology=SMT, PACKAGE=SOIC-8, PackageReference=SOIC-8
U2: "Accelerometer X, Y, Z Axis Â±2g, 4g, 8g, 16g 0.5Hz ~ 672Hz 14-LGA _2x2_", PACKAGE="LGA-14 STMicroelectronics", MF=STMicroelectronics, MP=LIS2DHTR, SnapEDA_Link=https://www.snapeda.com/parts/LIS2DHTR/STMicroelectronics/view-part/45205/?ref=snap
U3: library part CMP-0116-00693-1, "High Performance, 1-Mbit Flash Microcontroller with nanoWatt Technology, 128K Flash, 64-Pin TQFP, Industrial Temperature Range, Tape and Reel", Case/Package=TQFP-64, MFR=Microchip, MFR P/N=PIC18F67J10, PACKAGE="64 pin Microcontroller", ComponentLink1Description=Datasheet, ComponentLink1URL=http://www.microchip.com/mymicrochip/filehandler.aspx?ddocname=en022070, Mounting Technology=SMT
U5: library part ILQ615-4X009, "Transistor Output Optocouplers Phototransistor Out Quad CTR > 160-320%", Case/Package=SSOP-16, MFR="Vishay Semiconductors", MFR P/N=TCMT4106, Mounting Technology=SMT, PACKAGE=SSOP-16
U7 U8: "ON SEMICONDUCTOR - SZNUD3160LT1G - Relay Driver, Inductive Load, 61V to 70V Drain to Source, 150mA Out, SOT-23-3", Case/Package=SOT-23-3, MFR="ON Semiconductor", ComponentLink1Description=Datasheet, ComponentLink1URL=https://datasheet.ciiva.com/11165/nud3160-d-11165392.pdf?src-supplier=Avnet, Height=1.01mm, Length=3.04mm, MFR P/N=SZNUD3160LT1G, Mounting Technology=SMT, PACKAGE=SOT-23-3
U9: "High Side MOSFET Switcher", Case/Package=SOIC-8, MFR="International Rectifier/Infineon", ComponentLink1Description=Datasheet, ComponentLink1URL=http://www.infineon.com/dgdl/ips511g.pdf?fileId=5546d462533600a4015355c3ba2f161b, Detex P/N=102475‐1, MFR P/N=AUIPS7091GTR, Mounting Technology=SMT, PACKAGE=SOIC-8
VR1: library part "DC-DC Converter", Case/Package=SIP3, MFR=CUI, MFR P/N=VXO78-1000, ComponentLink1Description=Datasheet, ComponentLink1URL=https://www.cui.com/product/resource/vxo78-1000.pdf, Mounting Technology=Thru-Hole, PACKAGE=SIP3
Y1: library part XTAL, "Crystal Oscillator 8MHz", Case/Package="2-SMD, No Lead", MFR=Abracom, MFR P/N=ABM3AIG-8.000MHZ-8-K1Z-T, PACKAGE="SMD 8MHz Crystal Ocsillator", ComponentLink1Description=Datasheet, ComponentLink1URL=http://www.abracon.com/Resonators/abm3.pdf, Mounting Technology=SMT

## Free pads (board coordinates)
  round 100 hole 125 unplated mask+0: 0(80,1935)

## Via types
v1: diameter 22, hole 12, Layer 1 to Layer 3, 31 vias

## Nets (pads, with @x,y where several pads share a name; then routed paths per layer and width w, separated by ;. In a path a pad name is that pad's centre, name@x,y a point inside that pad or via, vN(x,y) a via of type N, cw(c..) or ccw(c..) an arc to the next point about the centre after c; other vN are vias at no path point)
3V3C: C46.1 C47.1 Q3.3 U2.7 U2.8 | length 223.3
  Layer 3 w8: C46.1@3256.5,945 3256.5,952.87 C46.1@3258.72,955.1
  Layer 3 w10: C46.1@3251.5,930 3251.5,937.83 3258.72,945.06 3258.72,955.1 3258.72,1020.29 3258.29,1020.29 3266.4,1020.34 3267.5,1020.35 3270.86,1023.71 3284.06,1036.91 U2.7@3284.06,1052.83
  Layer 3 w15: C47.1@3251.5,860 C46.1@3251.5,930
9V_INT: C7.1 CR1.2 CR2.2 Q1.2 R13.2 VR1.1 | length 2208.3
  Layer 3 w8: C7.1@3115.98,1735 C7.1@3117.91,1735 ; VR1.1@3222,1534 3268,1488 3292.19,1488 3304.13,1476.06 3768.6,1476.06 4027.62,1217.05 4027.62,1173.38 4186,1015 4186,961 4264,883 4376.69,883 R13.2@4434.69,825 ; R13.2@4425.43,812 R13.2@4430.54,806.89
  Layer 3 w10: Q1.2@4430.54,737.4 R13.2@4430.54,806.89
  Layer 3 w20: CR2.2@2994.02,1935 CR1.2@3115.98,1935 C7.1@3115.98,1735 ; C7.1@3117.91,1735 3117.91,1638.09 VR1.1@3222,1534
9VC: J3.1 Q1.3 U5.1 U5.3 U5.5 U5.7 | length 3213
  Layer 1 w8: v1(3543.75,385) 3543.75,452.3 3896,804.55 ; v1(3553,185) 3800.81,432.81 3800.81,532.81 ; v1(3553,285) 3800.81,532.81 ; J3.1@4280,1050 3908.5,1050 3896,1037.5 3896,804.55 ; 3800.81,532.81 3851.91,583.91 3851.91,750.35 3896,794.44 3896,804.55
  Layer 3 w8: U5.1@3448.11,85 3464.45,85 3553,173.55 v1(3553,185) U5.3@3448.11,185 ; U5.5@3448.11,285 v1(3553,285) ; U5.7@3448.11,385 v1(3543.75,385)
  Layer 3 w15: J3.1@4280,1050 4306,1024 4316,1024 4519.12,820.88 Q1.3@4519.12,700
24V: BR1.3 C2.1 L1.1 U9.5 U9.6 U9.7 U9.8 | length 2011.9
  Layer 1 w8: v1(2740,1875) 2848.75,1766.25 3981.75,1766.25 L1.1@4339,1409
  Layer 3 w8: L1.1@4339,1409 4340,1410 L1.1@4340,1415
  Layer 3 w30: L1.1@4340,1415 C2.1@4340,1478.5 ; U9.8@4566.77,95 U9.7@4566.77,145 U9.6@4566.77,195 U9.5@4566.77,245